# Altium PCB cSLIM-shield.PcbDoc (part 2 of 2)
Units mm, origin at the board's own origin, x right, y up, seen from the top; angles counter-clockwise.
Board outline 102.87 x 55.88 mm, 2 copper layers (F.Cu, B.Cu); 128 components, 156 nets, 529 pads, 123 vias.
Unrouted connection lines stored in the file: 8.
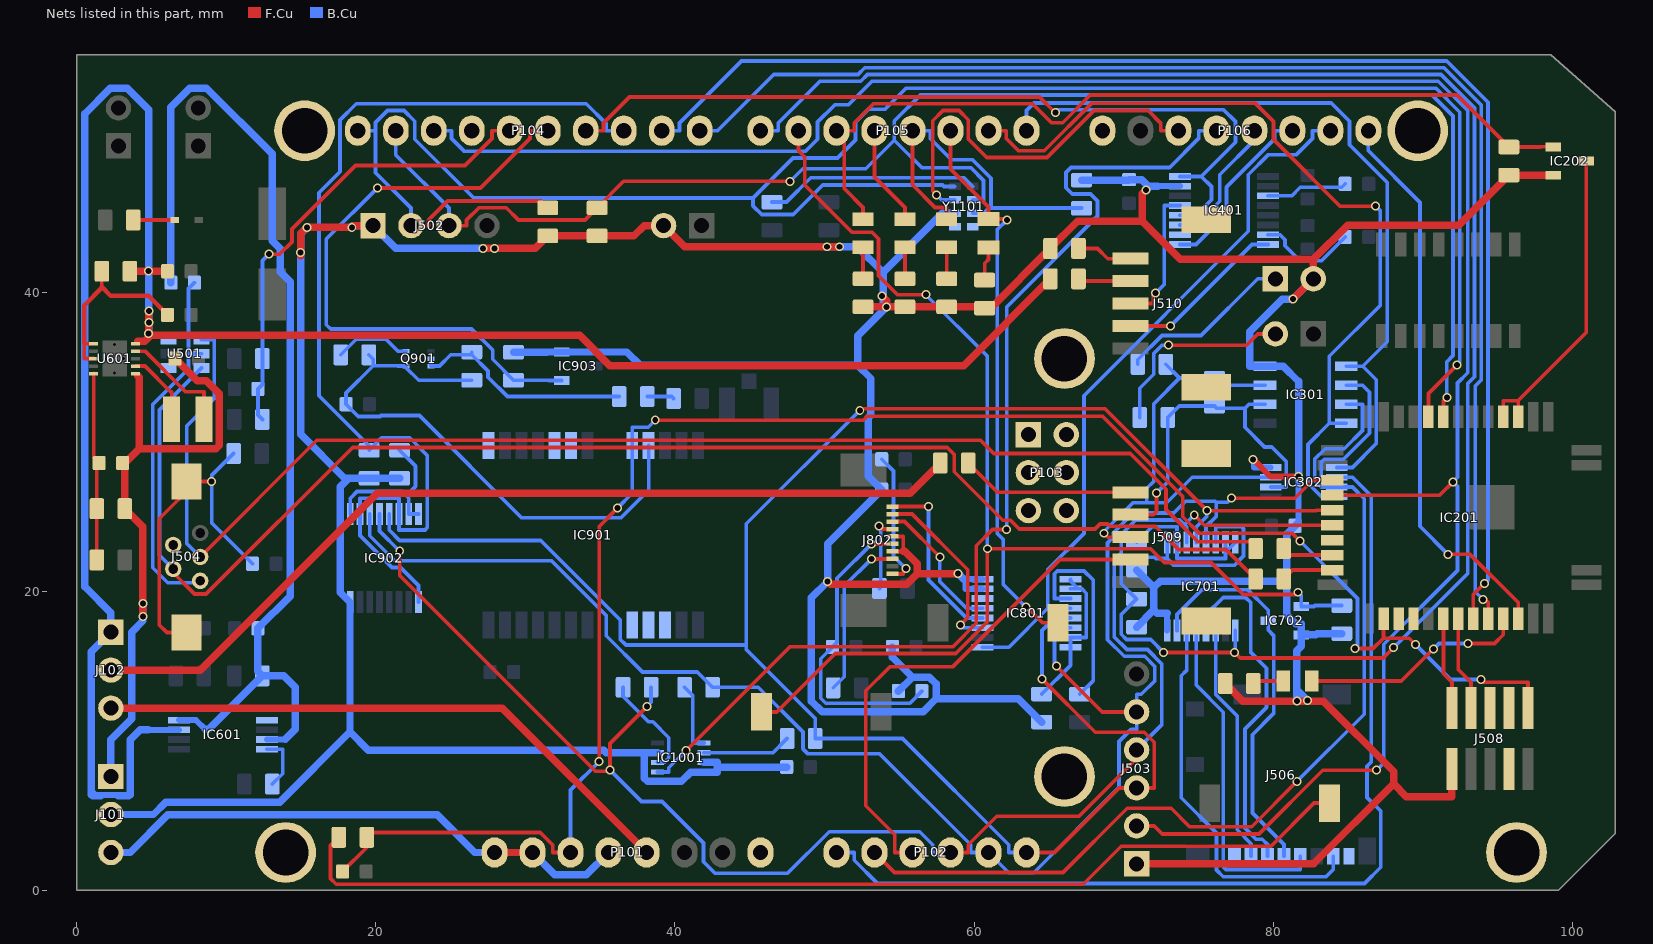
[diagram p2: the nets of this part, all layers, seen from the top]

## Via types
v1: diameter 0.6, hole 0.4, F.Cu to B.Cu, tented both sides, 123 vias

## Nets (pads, with @x,y where several pads share a name; then routed paths per layer and width w, separated by ;. In a path a pad name is that pad's centre, name@x,y a point inside that pad or via, vN(x,y) a via of type N, cw(c..) or ccw(c..) an arc to the next point about the centre after c; other vN are vias at no path point) (continued)
I2C_SCL: IC201.9 J502.2 P104.1 R102.1 Y1101.8 | length 136
  F.Cu w0.25: J502.2@22.352,44.45 23.527,44.45 23.527,44.817 24.802,46.092 31.046,46.092 R102.1@31.496,45.641 ; IC201.9@90.376,31.675 90.376,33.229 v1(92.277,35.13)
  B.Cu w0.25: P104.1@18.796,50.8 19.985,50.8 ; J502.2@22.352,44.45 22.352,45.625 19.985,47.992 19.985,50.8 ; 58.709,47.07 57.984,47.07 57.883,47.17 49.881,47.17 47.91,45.199 45.798,45.199 45.225,45.772 45.225,46.294 ; v1(92.277,35.13) 92.476,35.329 92.476,52.033 90.878,53.63 55.45,53.63 54.059,52.24 52.946,52.24 52.07,51.364 52.07,50.173 50.863,48.966 47.897,48.966 45.225,46.294 ; 19.985,50.8 19.985,51.352 20.781,52.148 21.887,52.148 22.606,51.429 22.606,50.231 26.543,46.294 45.225,46.294
I2C_SDA: IC201.8 J502.3 P104.2 R101.1 Y1101.2 | length 110.3
  F.Cu w0.25: J502.3@24.892,44.45 26.067,44.45 26.067,44.817 26.891,45.641 28.723,45.641 29.544,44.821 33.978,44.821 R101.1@34.798,45.641 36.568,47.411 v1(47.702,47.411) ; IC201.8@91.376,31.675 91.376,32.75 91.404,32.75 v1(91.602,32.949)
  B.Cu w0.25: P104.2@21.336,50.8 21.336,49.181 24.892,45.625 J502.3@24.892,44.45 ; v1(47.702,47.411) 48.538,48.247 52.749,48.247 54.667,50.165 ; 59.909,46.17 60.634,46.17 60.634,47.471 59.789,48.317 56.516,48.317 54.667,50.165 ; v1(91.602,32.949) 91.602,35.34 92.022,35.759 92.022,51.778 90.62,53.18 56.411,53.18 54.667,51.437 54.667,50.165
LoRa_nRESET: C603.1 IC201.25 IC901.8 J508.10 P101.3 R605.1 | length 121.9
  F.Cu w0.25: C603.1@17.781,1.27 19.402,2.891 R605.1@19.401,3.556 19.729,3.883 30.992,3.883 31.831,3.044 31.831,2.54 P101.3@33.02,2.54 ; v1(34.935,8.627) 34.935,24.343 v1(36.163,25.571) ; v1(38.681,31.446) 52.587,31.446 52.845,31.703 68.588,31.703 73.951,26.34 73.951,24.981 75.04,23.892 81.261,23.892 v1(81.773,23.38) ; v1(85.455,16.171) 86.677,16.171 87.376,16.869 ; IC201.25@87.376,18.175 87.376,17.1 87.376,16.869 ; v1(89.509,16.45) 89.09,16.869 87.376,16.869 ; v1(93.874,14.112) 94.07,13.915 97.028,13.915 J508.10@97.028,12.193
  B.Cu w0.25: P101.3@33.02,2.54 33.02,6.712 v1(34.935,8.627) ; v1(36.163,25.571) 37.144,26.552 IC901.8@37.144,29.749 37.144,30.974 38.21,30.974 v1(38.681,31.446) ; v1(81.773,23.38) 85.63,19.523 85.63,16.346 v1(85.455,16.171) ; v1(89.509,16.45) 91.848,14.112 v1(93.874,14.112)
LoRa_SWDCLK: IC201.30 J508.4 | length 6.3
  F.Cu w0.25: IC201.30@92.376,18.175 92.376,17.1 92.376,14.757 93.218,13.915 J508.4@93.218,12.193
LoRa_SWDIO: IC201.29 J508.2 | length 6.2
  F.Cu w0.25: IC201.29@91.376,18.175 91.376,14.487 91.948,13.915 J508.2@91.948,12.193
LoRa_SWO: J508.6
LoRa_USB_DM: IC201.22 R501.2 | length 3.5
  F.Cu w0.25: R501.2@80.693,20.828 81.291,21.425 IC201.22@83.956,21.425
LoRa_USB_DP: IC201.21 R502.2 | length 3.4
  F.Cu w0.25: R502.2@80.693,22.86 81.128,22.425 82.881,22.425 IC201.21@83.956,22.425
MOSI: IC801.11 J802.2 | length 12
  F.Cu w0.25: J802.2@54.531,25.167 55.854,25.167 59.576,21.445 59.576,18.244 v1(59.08,17.748)
  B.Cu w0.25: v1(59.08,17.748) 59.262,17.567 IC801.11@60.562,17.567
nCS: IC801.13 J802.3 | length 9.4
  F.Cu w0.25: J802.3@54.531,24.667 55.347,24.667 v1(57.708,22.306)
  B.Cu w0.25: v1(57.708,22.306) 57.708,20.658 59.499,18.867 IC801.13@60.562,18.867
Net-(C501-Pad1): C501.1 J504.MP1 J504.MP2 R503.1 | length 23.4
  F.Cu w0.25: J504.MP1@7.355,17.251 6.03,17.251 5.526,17.755 5.526,24.859 J504.MP2@8.018,27.351 ; J504.MP2@7.355,27.351 J504.MP2@8.018,27.351 ; v1(9.023,27.351) 8.68,27.351 J504.MP2@8.018,27.351
  B.Cu w0.25: R503.1@10.493,29.21 9.023,27.741 v1(9.023,27.351) 9.023,24.581 C501.1@11.76,21.844
Net-(C606-Pad1): C606.1 R607.1 U601.6 U601.8 | length 12.8
  F.Cu w0.25: U601.8@1.14,35.56 0.515,35.56 0.515,36.56 0.827,36.56 U601.6@1.14,36.56 ; 1.68,40.357 R607.1@1.681,41.402
  F.Cu w0.3: 0.515,36.56 0.508,36.567 0.508,39.116 1.68,40.288 1.68,40.357 2.286,39.751 4.826,39.751 5.609,38.968 5.609,38.943 C606.1@6.071,38.481
Net-(C608-Pad2): C608.2 R608.2 R609.1 U601.10 | length 12.7
  F.Cu w0.25: U601.10@1.14,34.56 1.14,28.934 C608.2@1.499,28.575 1.349,28.425 R608.2@1.349,25.527 R609.1@1.349,22.098
Net-(C806-Pad1): C806.1 FB802.2 J802.6 | length 20.4
  F.Cu w0.25: v1(53.134,23.167) J802.6@54.531,23.167
  B.Cu w0.25: v1(53.134,23.167) 50.836,20.87 50.836,16.586 C806.1@50.529,16.278 49.748,15.497 49.748,12.858 50.086,12.519 55.705,12.519 FB802.2@56.513,13.328
Net-(C902-Pad1): C902.1 IC901.9 Q901.4 R904.2 R906.2 | length 38.4
  B.Cu w0.25: R906.2@19.528,35.814 19.825,35.518 19.825,35.083 ; R904.2@26.416,34.115 22.866,34.115 22.025,34.956 Q901.4@22.025,35.06 21.465,35.06 21.442,35.083 19.825,35.083 ; IC901.9@38.244,29.749 38.244,26.768 36.401,24.925 29.742,24.925 22.912,31.754 20.352,31.754 20.291,31.694 18.827,31.694 C902.1@18.009,32.512 18.009,33.266 19.825,35.083
Net-(D601-Pad2): D601.2 R610.1 | length 2.8
  F.Cu w0.25: R610.1@3.779,44.831 D601.2@6.566,44.831
Net-(FB501-Pad2): FB501.2 J504.1 U501.5 | length 24.7
  B.Cu w0.25: FB501.2@7.874,40.64 7.484,40.249 7.484,35.88 ; J504.1@8.255,20.701 8.135,20.581 6.084,20.581 5.087,21.578 5.087,32.487 7.484,34.884 7.484,35.88 ; U501.5@8.339,35.88 7.484,35.88
Net-(FB801-Pad1): FB801.1 J802.10 | length 9.1
  F.Cu w0.25: J802.10@54.531,21.167 55.256,21.167 55.256,21.348 v1(55.433,21.525)
  B.Cu w0.25: FB801.1@53.823,28.829 54.61,28.042 54.61,22.348 v1(55.433,21.525)
Net-(H101-Pad1): H101.1
Net-(H102-Pad1): H102.1
Net-(H103-Pad1): H103.1
Net-(H104-Pad1): H104.1
Net-(H105-Pad1): H105.1
Net-(H106-Pad1): H106.1
Net-(IC201-Pad3): IC201.3 IC201.4 IC202.3 | length 21.1
  F.Cu w0.25: IC201.4@95.376,31.675 95.376,32.75 96.376,32.75 ; IC201.3@96.376,31.675 96.376,32.75 ; IC202.3@100.922,48.768 100.922,37.296 96.376,32.75
Net-(IC201-Pad20): IC201.20
Net-(IC201-Pad26): IC201.26
Net-(IC201-Pad27): IC201.27
Net-(IC401-Pad10): IC401.10
Net-(IC601-Pad1): IC601.1
Net-(IC601-Pad4): IC601.4 R604.1 | length 3.7
  B.Cu w0.25: IC601.4@12.717,9.439 13.78,9.439 13.78,7.811 R604.1@13.08,7.112
Net-(IC701-Pad2): IC701.2 IC701.7 IC701.8 R702.1 | length 10.4
  B.Cu w0.25: R702.1@70.866,23.289 71.897,24.321 73.559,24.321 IC701.2@73.559,23.258 73.559,22.195 76.809,22.195 IC701.7@76.809,22.727 ; IC701.7@76.809,23.258 IC701.7@76.809,22.727 ; IC701.8@77.459,23.258 76.928,22.727 IC701.7@76.809,22.727
Net-(IC801-Pad1): IC801.1 IC801.2 IC801.7 IC801.8 R802.1 | length 10.7
  B.Cu w0.25: R802.1@64.516,13.129 66.438,15.051 IC801.8@66.438,16.267 IC801.7@66.438,16.917 67.501,16.917 67.501,19.877 67.211,20.167 IC801.2@66.969,20.167 ; IC801.2@66.438,20.167 IC801.2@66.969,20.167 ; IC801.1@66.438,20.817 66.438,20.698 IC801.2@66.969,20.167
Net-(IC801-Pad3): IC801.3 R805.1 | length 13.7
  B.Cu w0.25: IC801.3@66.438,19.517 65.375,19.517 65.375,21.179 65.564,21.367 67.354,21.367 67.974,20.748 67.974,14.047 R805.1@67.056,13.129
Net-(IC801-Pad14): IC801.14
Net-(IC901-Pad1): IC901.1
Net-(IC901-Pad5): IC901.5
Net-(IC901-Pad6): IC901.6
Net-(IC901-Pad15): IC901.15
Net-(IC901-Pad16): IC901.16
Net-(IC901-Pad17): IC901.17
Net-(IC902-Pad1): IC902.1 IC902.7 IC902.8 R902.1 | length 10.8
  B.Cu w0.25: IC902.1@18.299,25.163 18.299,26.226 18.749,26.676 21.749,26.676 22.03,26.395 ; R902.1@21.59,29.434 22.654,28.37 22.654,27.018 22.03,26.395 ; IC902.8@22.849,25.163 IC902.7@22.199,25.163 22.199,26.226 22.03,26.395
Net-(IC1001-Pad2): IC1001.2 R1001.2 | length 7
  B.Cu w0.25: R1001.2@36.528,13.589 36.528,12.984 38.234,11.277 38.523,11.277 39.586,10.214 39.586,8.868 39.283,8.565 IC1001.2@38.836,8.565
Net-(IC1001-Pad5): IC1001.5 R1003.2 | length 4.7
  B.Cu w0.25: R1003.2@40.641,13.589 41.186,13.044 41.186,9.865 IC1001.5@41.936,9.865
Net-(IC1001-Pad6): IC1001.6 R1002.2 | length 6
  B.Cu w0.25: IC1001.6@41.936,9.215 46.554,9.215 R1002.2@47.499,10.16
Net-(J301-Pad1): J301.1 R302.1 | length 11.7
  B.Cu w0.25: R302.1@70.945,35.179 70.945,35.478 72.568,37.102 75.169,37.102 78.962,40.894 J301.1@80.137,40.894
Net-(J302-Pad2): J302.2 R303.2 | length 13.3
  F.Cu w0.25: v1(73,36.454) 78.205,36.454 78.962,37.211 J302.2@80.137,37.211
  B.Cu w0.25: R303.2@71.072,31.623 71.072,33.576 72.006,34.511 72.006,35.902 72.558,36.454 v1(73,36.454)
Net-(J504-Pad4): J504.4
Net-(J506-Pad1): J506.1
Net-(J506-Pad8): J506.8
Net-(J508-Pad7): J508.7
Net-(J508-Pad8): J508.8
Net-(J509-Pad1): J509.1 R509.1 | length 11.7
  F.Cu w0.25: R509.1@59.611,28.575 61.564,26.622 J509.1@70.46,26.622
Net-(J509-PadMP1): J509.MP1
Net-(J509-PadMP2): J509.MP2
Net-(J510-Pad1): J510.1 R508.1 | length 3.8
  F.Cu w0.25: R508.1@66.977,42.926 68.252,42.926 68.935,42.243 J510.1@70.46,42.243
Net-(J510-Pad2): J510.2 R511.1 | length 3.5
  F.Cu w0.25: R511.1@66.977,40.894 67.128,40.743 J510.2@70.46,40.743
Net-(J510-PadMP1): J510.MP1
Net-(J510-PadMP2): J510.MP2
Net-(J802-Pad4): J802.4 R801.1 | length 5.2
  F.Cu w0.25: v1(53.627,24.359) 53.806,24.18 53.806,24.167 J802.4@54.531,24.167
  B.Cu w0.25: v1(53.627,24.359) 53.761,24.225 53.761,20.281 R801.1@53.673,20.193
Net-(J802-Pad8): J802.8 R804.1 | length 11.1
  F.Cu w0.25: v1(53.135,22.167) J802.8@54.531,22.167
  B.Cu w0.25: R804.1@50.579,13.548 51.316,14.286 51.316,20.348 v1(53.135,22.167)
Net-(L601-Pad1): L601.1 U601.4 | length 7.5
  F.Cu w0.25: U601.4@3.94,36.06 4.565,36.06 7.279,33.346 8.51,33.346 L601.1@8.51,31.496
Net-(L601-Pad2): L601.2 U601.2 | length 5
  F.Cu w0.25: U601.2@3.94,35.06 4.565,35.06 6.279,33.346 6.35,33.346 L601.2@6.35,31.496
Net-(L901-Pad2): L901.2 R905.2 | length 1.8
  B.Cu w0.25: R905.2@38.148,33.02 39.782,33.02 L901.2@39.909,32.893
Net-(LED501-Pad2): LED501.2 R504.1 | length 2.3
  F.Cu w0.25: R504.1@60.706,40.815 60.706,41.938 60.96,42.192 LED501.2@60.96,42.992
Net-(LED502-Pad2): LED502.2 R505.1 | length 2.1
  F.Cu w0.25: R505.1@58.166,40.894 LED502.2@58.166,42.992
Net-(LED503-Pad2): LED503.2 R506.1 | length 2.1
  F.Cu w0.25: R506.1@55.372,40.894 LED503.2@55.372,42.992
Net-(LED504-Pad2): LED504.2 R507.1 | length 2.1
  F.Cu w0.25: R507.1@52.578,40.894 LED504.2@52.578,42.992
Net-(LED505-Pad2): LED505.2 R510.1 | length 2.1
  F.Cu w0.25: R510.1@78.661,13.843 78.819,14 LED505.2@80.679,14
Net-(P101-Pad8): P101.8
Net-(P103-Pad1): P103.1
Net-(P103-Pad2): P103.2
Net-(P103-Pad3): P103.3
Net-(P103-Pad4): P103.4
Net-(P103-Pad5): P103.5
Net-(P103-Pad6): P103.6
Net-(P104-Pad4): P104.4
Net-(P106-Pad1): P106.1
Net-(Q901-Pad2): Q901.2 Q901.3 R904.1 R905.1 | length 15
  B.Cu w0.25: Q901.2@23.695,35.56 Q901.3@23.695,35.06 24.255,35.06 25.013,35.817 R904.1@26.416,35.817 ; R904.1@26.416,35.989 R904.1@26.416,35.817 ; R905.1@36.274,33.02 28.795,33.02 27.495,34.32 27.495,34.738 R904.1@26.416,35.817
Net-(Q901-Pad6): Q901.6 R906.1 | length 5.1
  B.Cu w0.25: R906.1@17.654,35.814 18.688,36.849 20.676,36.849 21.465,36.06 Q901.6@22.025,36.06
Net-(R605-Pad2): R605.2 S601.1 | length 72.2
  F.Cu w0.25: R605.2@17.527,3.556 16.973,3.002 16.973,0.809 17.36,0.422 67.299,0.422 69.831,2.953 79.842,2.953 82.731,5.842 S601.1@83.756,5.842
Net-(R1101-Pad1): R1101.1 Y1101.1 | length 14.3
  B.Cu w0.25: R1101.1@46.482,46.022 47.46,46.022 49.083,47.645 59.334,47.645 59.909,47.07
Net-(U501-Pad1): U501.1
Net-(U501-Pad3): U501.3
P0.00: IC301.1 IC302.1 P105.8 | length 51.7
  B.Cu w0.25: P105.8@63.5,50.8 63.5,52.141 64.001,52.643 83.877,52.643 85.09,51.43 85.09,49.864 87.628,47.326 87.628,36.692 85.987,35.052 ; IC302.1@84.254,28.28 85.292,28.28 86.892,29.88 86.892,34.148 85.987,35.052 ; IC301.1@84.881,35.052 85.969,35.052 85.987,35.052
P0.01: IC301.4 IC302.4 P105.7 | length 55.7
  F.Cu w0.25: P105.7@60.96,50.8 62.149,50.8 62.149,50.28 62.97,49.459 64.691,49.459 67.856,52.624 78.805,52.624 80.01,51.419 80.01,50.207 84.465,45.752 v1(86.836,45.752)
  B.Cu w0.25: IC302.4@84.254,26.33 83.216,26.33 82.316,27.231 82.316,29.811 83.746,31.242 ; IC301.4@84.881,31.242 83.906,31.242 83.746,31.242 ; v1(86.836,45.752) 87.162,45.426 87.162,39.13 83.746,35.714 83.746,31.242
P0.02: LED501.1 P105.6 PB2.1 | length 37.7
  F.Cu w0.25: P105.6@58.42,50.8 58.42,48.232 60.96,45.692 LED501.1@60.96,44.892 62.01,44.892 62.066,44.836 v1(62.2,44.836) ; v1(63.459,18.945) 63.531,18.945 64.57,17.907 PB2.1@65.595,17.907
  B.Cu w0.25: v1(62.2,44.836) 61.55,44.186 61.55,23.874 61.949,23.475 61.949,20.455 v1(63.459,18.945)
P0.03: LED502.1 P105.5 R1103.1 Y1101.3 | length 23.6
  F.Cu w0.25: P105.5@55.88,50.8 55.88,49.459 55.88,47.178 57.391,45.667 58.166,45.667 LED502.1@58.166,44.892
  B.Cu w0.25: P105.5@55.88,50.8 57.069,50.8 57.069,50.28 58.498,48.851 59.899,48.851 61.135,47.615 61.135,45.623 ; 59.909,45.27 60.634,45.27 60.987,45.623 61.135,45.623 ; R1103.1@67.183,45.623 61.135,45.623
P0.04: LED503.1 P105.4 | length 6.7
  F.Cu w0.25: P105.4@53.34,50.8 53.34,49.459 53.34,47.699 55.372,45.667 LED503.1@55.372,44.892
P0.05: IC202.1 LED504.1 P105.3 R203.1 | length 58.1
  F.Cu w0.25: P105.3@50.8,50.8 P105.3@51.312,50.8 ; LED504.1@52.578,44.892 52.578,45.667 51.312,46.933 P105.3@51.312,50.8 ; IC202.1@98.722,49.718 97.872,49.718 97.859,49.705 R203.1@95.758,49.705 92.287,53.176 67.772,53.176 65.928,51.332 65.167,51.332 63.895,52.604 53.273,52.604 51.989,51.32 51.989,50.8 P105.3@51.312,50.8
P0.06: IC702.1 P105.2 PB1.1 R703.1 | length 83.4
  F.Cu w0.25: PB1.1@45.784,11.938 46.809,11.938 50.723,15.852 58.768,15.852 60.887,17.971 v1(60.887,22.847) 71.796,22.847 72.708,21.935 75.843,21.935 77.992,19.786 81.508,19.786 v1(81.662,19.939) ; P105.2@48.26,50.8 48.26,49.459 48.672,49.047 48.672,47.165 51.832,44.005 53.179,44.005 53.608,43.576 53.608,41.099 54.873,39.833 v1(56.773,39.833)
  B.Cu w0.25: v1(56.773,39.833) 60.887,35.719 v1(60.887,22.847) ; v1(81.662,19.939) 81.872,19.729 IC702.1@81.872,18.984 82.722,18.984 82.789,19.051 R703.1@84.582,19.05
P0.07: IC701.1 IC701.6 IC701.9 P105.1 R701.1 | length 129.8
  F.Cu w0.25: v1(72.67,15.913) v1(77.42,15.913) 77.788,15.545 87.352,15.545 v1(88.051,16.244)
  B.Cu w0.25: P105.1@45.72,50.8 46.909,50.8 46.909,51.32 49.698,54.109 52.42,54.109 52.87,54.559 91.223,54.559 93.449,52.333 93.449,34.351 92.999,33.901 92.999,21.192 v1(88.051,16.244) ; v1(72.67,15.913) 71.804,16.779 70.186,16.779 69.84,17.126 69.84,18.453 R701.1@70.866,19.479 69.839,20.506 69.839,21.94 70.172,22.274 72.081,22.274 72.16,22.195 72.909,22.195 ; IC701.1@72.909,23.258 72.909,22.195 ; IC701.6@76.159,23.258 76.159,24.321 77.881,24.321 78.009,24.193 78.009,22.357 77.388,21.736 73.368,21.736 72.909,22.195 ; v1(77.42,15.913) 77.459,15.953 IC701.9@77.459,17.382
P0.08: IC201.32 P104.10 | length 90
  F.Cu w0.25: v1(94.038,19.44) 94.187,19.44 94.376,19.25 IC201.32@94.376,18.175
  B.Cu w0.25: P104.10@41.656,50.8 42.845,50.8 46.604,54.559 52.233,54.559 52.683,55.009 91.41,55.009 93.9,52.519 93.9,34.13 93.502,33.733 93.502,19.975 v1(94.038,19.44)
P0.09: IC201.31 P104.9 | length 93.5
  F.Cu w0.25: IC201.31@93.376,18.175 93.376,19.784 v1(94.129,20.538)
  B.Cu w0.25: P104.9@39.116,50.8 40.305,50.8 40.305,51.32 44.445,55.46 91.596,55.46 94.35,52.706 94.35,20.758 v1(94.129,20.538)
P0.10: IC902.2 IC902.6 IC902.9 P104.8 R901.1 | length 69.5
  B.Cu w0.25: R901.1@19.558,29.434 R901.1@19.7,29.576 ; IC902.9@22.849,19.287 22.849,20.397 21.652,21.595 21.084,21.595 18.949,23.73 IC902.2@18.949,25.163 18.949,26.226 21.549,26.226 IC902.6@21.549,25.163 21.549,24.1 23.285,24.1 23.445,24.26 23.445,29.089 22.27,30.264 20.388,30.264 R901.1@19.7,29.576 ; P104.8@36.576,50.8 35.387,50.8 35.387,51.284 34.072,52.599 18.688,52.599 17.602,51.513 17.602,48.059 16.195,46.651 16.195,33.081 R901.1@19.7,29.576
P0.11: IC401.12 IC401.16 P104.7 | length 55.9
  F.Cu w0.25: P104.7@34.036,50.8 35.225,50.8 35.225,51.32 36.959,53.054 64.374,53.054 v1(65.427,52.001)
  B.Cu w0.25: v1(65.427,52.001) 65.619,52.192 76.683,52.192 77.47,51.405 77.47,50.019 75.192,47.741 ; IC401.12@73.77,45.141 74.833,45.141 75.871,46.18 75.871,47.061 75.192,47.741 ; IC401.16@73.77,47.741 75.192,47.741
P0.12: IC903.1 P104.6 R903.1 | length 41.5
  F.Cu w0.25: v1(20.107,46.97) 26.997,46.97 30.307,50.28 30.307,50.8 P104.6@31.496,50.8
  B.Cu w0.25: v1(20.107,46.97) 16.686,43.548 16.686,37.83 16.982,37.534 26.406,37.534 27.813,36.127 27.813,35.512 R903.1@29.21,34.115 31.565,34.115 31.578,34.102 IC903.1@32.428,34.102
P0.13: C602.1 P104.5 R601.1 R603.1 | length 31.8
  F.Cu w0.25: v1(12.851,42.545) 13.575,42.545 14.39,43.36 14.39,44.221 18.639,48.47 25.957,48.47 27.767,50.28 27.767,50.8 P104.5@28.956,50.8
  B.Cu w0.25: R603.1@12.416,31.496 12.117,31.796 C602.1@12.116,33.528 12.417,33.828 R601.1@12.416,35.56 12.417,42.111 v1(12.851,42.545)
P0.14: IC301.2 IC302.2 P102.1 | length 76.7
  B.Cu w0.25: P102.1@50.8,2.54 51.989,2.54 51.989,2.02 53.539,0.47 86.1,0.47 87.183,1.554 87.183,5.311 86.272,6.222 86.272,8.3 86.553,8.582 86.553,26.368 85.292,27.63 85.179,27.63 84.607,27.63 IC302.2@84.254,27.63 83.216,27.63 83.216,28.64 83.407,28.83 84.701,28.83 86.441,30.571 86.441,33.31 85.969,33.782 IC301.2@84.881,33.782
P0.15: IC301.3 IC302.3 P102.2 | length 65.2
  F.Cu w0.25: P102.2@53.34,2.54 54.681,1.199 65.944,1.199 70.238,5.493 73.183,5.493 74.41,4.267 78.562,4.267 v1(81.575,7.279)
  B.Cu w0.25: v1(81.575,7.279) 86.081,11.785 86.081,26.191 85.292,26.98 84.66,26.98 IC302.3@84.254,26.98 83.216,26.98 82.766,27.43 82.766,28.827 83.479,29.54 84.754,29.54 85.969,30.755 85.969,32.512 IC301.3@84.881,32.512
P0.16: J509.4 P102.3 | length 34.1
  F.Cu w0.25: P102.3@55.88,2.54 54.691,2.54 54.691,3.729 52.759,5.661 52.759,13.356 54.354,14.951 58.562,14.951 65.733,22.122 68.935,22.122 J509.4@70.46,22.122
P0.17: IC201.19 IC701.3 IC902.4 J503.4 P102.4 R1001.1 | length 109
  F.Cu w0.25: v1(21.6,22.682) 21.6,21.061 34.693,7.969 35.563,7.969 v1(35.658,8.063) 35.658,9.834 v1(38.121,12.297) ; P102.4@58.42,2.54 59.609,2.54 59.609,3.06 61.515,4.966 67.022,4.966 70.866,8.81 J503.4@70.866,9.398 ; v1(74.718,25.099) 75.392,24.425 IC201.19@83.956,24.425
  B.Cu w0.25: IC902.4@20.249,25.163 20.249,24.033 v1(21.6,22.682) ; v1(35.658,8.063) 37.77,5.951 39.131,5.951 41.91,3.172 41.91,1.924 42.682,1.152 47.533,1.152 50.312,3.931 56.36,3.931 57.231,3.06 57.231,2.54 P102.4@58.42,2.54 ; v1(38.121,12.297) 38.402,12.579 R1001.1@38.402,13.589 ; J503.4@70.866,9.398 72.537,11.069 72.537,15.162 71.595,16.104 70.219,16.104 69.368,16.955 69.368,22.106 69.84,22.578 69.84,23.808 70.807,24.776 73.741,24.776 74.061,24.456 74.074,24.456 ; IC701.3@74.209,23.258 74.209,24.321 74.074,24.456 ; v1(74.718,25.099) 74.074,24.456
P0.18: IC201.16 IC701.5 IC801.6 IC902.3 J503.5 P102.5 R1003.1 | length 115.1
  F.Cu w0.25: v1(65.494,15.005) 68.561,11.938 J503.5@70.866,11.938 ; v1(77.217,26.226) 81.442,26.226 82.64,27.425 IC201.16@83.956,27.425
  B.Cu w0.25: IC902.3@19.599,25.163 19.599,24.1 19.599,23.717 21.267,22.05 31.741,22.05 35.405,18.385 35.405,17.036 37.826,14.615 41.489,14.615 R1003.1@42.515,13.589 45.575,13.589 48.56,10.604 48.56,9.469 48.895,9.134 53.697,9.134 59.771,3.06 59.771,2.54 P102.5@60.96,2.54 62.319,1.181 63.989,1.181 69.691,6.882 69.691,9.955 70.499,10.763 70.866,10.763 70.866,11.35 J503.5@70.866,11.938 70.866,13.113 71.178,13.113 72.078,14.012 72.078,14.984 71.408,15.653 70.033,15.653 68.918,16.769 68.918,23.236 69.299,23.617 69.299,23.904 70.625,25.23 73.345,25.23 74.137,26.022 76.116,26.022 76.186,25.952 ; v1(65.494,15.005) 65.375,15.124 65.375,17.567 IC801.6@66.438,17.567 ; IC701.5@75.509,23.258 75.509,24.334 76.186,25.011 76.186,25.952 ; v1(77.217,26.226) 76.943,25.952 76.186,25.952
P0.19: IC201.18 IC701.4 IC801.5 IC902.5 J503.3 P102.6 R1002.1 | length 138.5
  F.Cu w0.25: v1(52.355,32.098) 52.46,32.203 68.755,32.203 v1(75.561,25.397) 82.852,25.397 82.881,25.425 IC201.18@83.956,25.425 ; P102.6@63.5,2.54 65.373,2.54 69.691,6.858 J503.3@70.866,6.858 72.041,6.858 72.041,9.909 71.377,10.573 68.104,10.573 v1(64.539,14.138)
  B.Cu w0.25: IC902.5@20.899,25.163 20.899,24.1 21.593,23.407 31.021,23.407 36.347,18.08 36.347,16.785 36.722,16.411 44.769,16.411 ; v1(52.355,32.098) 44.769,24.512 44.769,16.411 ; P102.6@63.5,2.54 62.311,2.54 62.311,3.06 55.211,10.16 R1002.1@49.373,10.16 49.374,11.498 44.769,16.102 44.769,16.411 ; v1(64.539,14.138) 64.539,17.381 65.375,18.217 IC801.5@66.438,18.217 ; IC701.4@74.859,23.258 74.859,24.321 75.561,25.023 v1(75.561,25.397)
P0.20: IC201.17 J503.2 P104.3 | length 146.8
  F.Cu w0.25: J503.2@70.866,4.318 72.041,4.318 72.583,3.776 79.05,3.776 83.315,8.041 v1(86.897,8.041) ; IC201.17@83.956,26.425 91.118,26.425 v1(92.013,27.32)
  B.Cu w0.25: P104.3@23.876,50.8 25.065,50.8 25.065,50.28 25.929,49.416 48.717,49.416 49.53,50.229 49.53,51.374 50.693,52.537 51.597,52.537 53.169,54.109 91.036,54.109 92.999,52.146 92.999,34.616 92.318,33.934 92.318,27.624 v1(92.013,27.32) 92.317,27.015 92.317,21.395 87.385,16.462 87.385,8.529 v1(86.897,8.041)
P0.21: IC201.34 P106.8 | length 37.6
  F.Cu w0.25: v1(91.692,22.472) 93.154,22.472 96.376,19.25 IC201.34@96.376,18.175
  B.Cu w0.25: P106.8@86.36,50.8 86.36,49.459 89.817,46.002 89.817,24.348 v1(91.692,22.472)
P0.22: IC801.4 IC801.9 P106.7 | length 48.5
  B.Cu w0.25: IC801.9@60.562,16.267 62.324,16.267 64.924,18.867 ; IC801.4@66.438,18.867 64.924,18.867 ; P106.7@83.82,50.8 82.631,50.8 82.631,50.28 81.548,49.197 79.678,49.197 78.329,47.847 78.329,44.068 67.342,33.082 67.342,23.874 64.924,21.456 64.924,18.867
P0.23: IC401.9 P106.6 | length 12
  B.Cu w0.25: IC401.9@73.77,43.191 74.833,43.191 76.869,45.227 76.869,47.024 80.091,50.247 80.091,50.8 P106.6@81.28,50.8
P0.24: IC401.11 P106.5 | length 9
  B.Cu w0.25: IC401.11@73.77,44.491 74.833,44.491 76.418,46.076 76.418,47.847 78.74,50.169 P106.5@78.74,50.8
P0.25: IC1001.1 P106.4 | length 72.7
  F.Cu w0.25: v1(40.749,9.366) 47.685,16.302 58.581,16.302 60.147,17.867 60.147,23.045 61.234,24.132 v1(62.175,24.132)
  B.Cu w0.25: IC1001.1@38.836,7.915 39.586,7.915 39.586,8.203 v1(40.749,9.366) ; v1(62.175,24.132) 62.175,39.016 68.248,45.089 68.248,46.093 67.78,46.561 66.566,46.561 66.149,46.977 66.149,48.011 66.483,48.345 73.076,48.345 75.011,50.28 75.011,50.8 P106.4@76.2,50.8
P0.26: P106.3 Y1101.7 | length 27.4
  F.Cu w0.25: v1(57.487,46.513) 57.231,46.769 57.231,51.46 57.92,52.149 58.993,52.149 59.609,51.533 59.609,50.236 60.838,49.007 64.876,49.007 68.018,52.148 71.643,52.148 72.471,51.32 72.471,50.8 P106.3@73.66,50.8
  B.Cu w0.25: v1(57.487,46.513) 57.83,46.17 58.709,46.17
PB03: IC201.33 LED505.1 | length 15.2
  F.Cu w0.25: LED505.1@82.579,14 88.562,14 v1(90.72,16.158) ; v1(93.011,16.51) 94.786,16.51 95.376,17.1 IC201.33@95.376,18.175
  B.Cu w0.25: v1(90.72,16.158) 91.072,16.51 v1(93.011,16.51)
RS232_RX: IC401.8 J510.4 | length 11.4
  F.Cu w0.25: J510.4@70.46,37.743 v1(73.135,37.743)
  B.Cu w0.25: v1(73.135,37.743) 78.583,43.191 IC401.8@79.646,43.191
RS232_TX: IC401.13 J510.3 | length 9.4
  F.Cu w0.25: J510.3@70.46,39.243 71.985,39.243 71.985,39.79 v1(72.138,39.942)
  B.Cu w0.25: v1(72.138,39.942) 72.707,40.512 72.707,45.791 IC401.13@73.77,45.791
RS485_A: IC301.6 IC302.6 J509.2 R301.2 R303.1 | length 23.2
  F.Cu w0.25: J509.2@70.46,25.122 71.985,25.122 72.198,25.335 v1(72.198,26.571)
  B.Cu w0.25: v1(72.198,26.571) 72.946,27.32 R303.1@72.946,31.623 73.708,32.385 R301.2@76.073,32.385 76.212,32.246 78.104,32.246 ; IC301.6@79.457,32.512 78.369,32.512 78.104,32.246 ; IC302.6@79.83,26.98 80.868,26.98 80.868,28.684 79.902,29.65 79.417,29.65 78.104,30.964 78.104,32.246
RS485_B: IC301.7 IC302.7 J509.3 R301.1 R302.2 | length 31.1
  F.Cu w0.25: v1(68.674,23.883) 68.935,23.622 J509.3@70.46,23.622
  B.Cu w0.25: v1(68.674,23.883) 68.674,23.979 70.621,25.927 71.549,25.927 ; R302.2@72.819,35.179 73.739,34.26 ; IC301.7@79.457,33.782 78.369,33.782 76.551,33.782 R301.1@76.073,34.26 73.739,34.26 ; IC302.7@79.83,27.63 74.578,27.63 72.875,25.927 71.549,25.927 ; 71.549,25.927 71.549,26.888 72.009,27.348 72.009,32.53 73.739,34.26
SCK: IC801.12 J802.1 | length 12
  F.Cu w0.25: J802.1@54.531,25.667 v1(56.95,25.667)
  B.Cu w0.25: v1(56.95,25.667) 56.95,20.766 59.499,18.217 IC801.12@60.562,18.217
TBR_PWR: J102.2 R509.2 | length 61.2
  F.Cu w0.5: J102.2@2.286,14.732 8.251,14.732 20.085,26.567 55.728,26.567 R509.2@57.737,28.575
USB_N: J504.2 R501.1 U501.6 | length 96.8
  F.Cu w0.25: J504.2@6.455,21.501 6.455,21.241 7.877,19.819 8.652,19.819 18.456,29.624 58.208,29.624 58.674,29.158 58.674,28 61.917,24.758 62.435,24.758 63.023,24.169 68.075,24.169 68.415,24.509 68.94,24.509 69.101,24.347 72.114,24.347 73.656,22.805 76.841,22.805 R501.1@78.819,20.828
  B.Cu w0.25: J504.2@6.455,21.501 5.538,22.418 5.538,32.129 U501.6@8.339,34.93
USB_P: J504.3 R502.1 U501.4 | length 94.1
  F.Cu w0.25: J504.3@8.255,22.301 16.05,30.097 60.431,30.097 61.317,29.21 70.444,29.21 72.824,26.831 72.824,25.472 74.973,23.322 78.356,23.322 R502.1@78.819,22.86
  B.Cu w0.25: J504.3@8.255,22.301 7.366,23.19 7.366,31.055 9.194,32.884 9.194,36.83 U501.4@8.339,36.83
USB_VBUS: C601.1 FB501.1 IC601.3 IC601.8 R602.1 | length 72.1
  B.Cu w0.4: IC601.8@6.841,11.389 7.979,11.389 8.601,10.767 ; IC601.3@12.717,10.089 13.855,10.089 13.876,10.11 13.934,10.11
  B.Cu w0.5: FB501.1@6.299,40.64 6.299,52.369 7.574,53.643 8.68,53.643 13.064,49.259 13.064,43.441 13.601,42.905 13.601,41.359 14.272,40.688 14.272,19.681 C601.1@12.116,17.526 12.117,14.651 R602.1@12.416,14.351 ; 8.601,10.767 8.833,10.767 R602.1@12.416,14.351 ; 13.934,10.11 14.605,10.781 14.605,13.589 13.843,14.351 R602.1@12.416,14.351
uSD_CLK: IC701.13 J506.5 | length 22.6
  B.Cu w0.25: IC701.13@74.859,17.382 74.859,16.319 74.859,13.717 76.663,11.914 76.663,1.579 76.834,1.407 81.813,1.407 J506.5@81.813,2.282
uSD_MISO: IC701.14 J506.7 | length 26.2
  B.Cu w0.25: IC701.14@74.209,17.382 74.209,14.714 73.853,14.357 73.853,6.207 76.212,3.847 76.212,1.365 76.657,0.921 83.527,0.921 84.013,1.407 J506.7@84.013,2.282
uSD_MOSI: IC701.12 J506.3 | length 23.5
  B.Cu w0.25: IC701.12@75.509,17.382 75.509,18.445 76.66,19.596 78.14,19.596 78.503,19.232 78.503,15.902 79.553,14.852 79.553,12.243 78.105,10.795 78.105,4.172 78.848,3.429 79.266,3.429 79.613,3.082 J506.3@79.613,2.282
uSD_nCS: IC701.11 J506.2 | length 16.1
  B.Cu w0.25: IC701.11@76.159,17.382 76.159,13.102 77.587,11.674 77.587,4.054 78.513,3.128 J506.2@78.513,2.282
uSD_VDD: IC701.15 IC702.3 J506.4 | length 28.3
  B.Cu w0.25: IC701.15@73.559,17.382 73.559,18.445 75.212,20.098 78.306,20.098 79.672,18.732 79.672,18.659 IC702.3@79.672,18.034 79.672,17.409 80.025,17.056 80.025,11.923 80.025,11.826 78.613,10.414 78.613,5.182 80.713,3.082 ; 79.444,4.351 80.713,3.082 ; J506.4@80.713,2.282 80.713,3.082
V+: C401.1 IC401.3 | length 5.5
  B.Cu w0.25: IC401.3@79.646,46.441 81.236,46.441 81.811,47.015 84.582,47.015 C401.1@84.811,47.244
V-: C402.1 IC401.7 | length 6.8
  B.Cu w0.25: IC401.7@79.646,43.841 80.456,43.841 80.793,43.504 80.793,43.108 81.795,42.105 83.228,42.105 C402.1@84.811,43.688
V_MUX_OUT: C605.1 IC601.7 J102.1 R511.2 R607.2 U601.5 | length 148.3
  F.Cu w0.24: U601.5@3.94,36.56 4.096,36.716
  F.Cu w0.5: R607.2@3.555,41.402 v1(4.813,41.402) C605.1@6.071,41.402 ; 4.096,36.716 4.55,36.716 v1@4.826,36.991 ; v1@4.826,37.338 v1@4.826,36.991 ; v1(4.826,38.735) 4.826,38.481 v1(4.826,37.973) v1@4.826,36.991 ; v1@4.942,37.107 33.637,37.107 35.648,35.096 59.305,35.096 R511.2@65.103,40.894
  B.Cu w0.4: 1.036,6.604 1.27,6.37 3.324,6.37 ; 4.297,10.739 4.77,10.739 IC601.7@6.841,10.739
  B.Cu w0.5: 1.27,6.32 1.076,6.32 ; 1.602,6.32 1.076,6.32 ; 2.774,6.32 3.496,6.32 3.586,6.41 3.586,10.082 4.243,10.739 ; 4.297,10.739 4.243,10.739 ; 4.77,10.739 4.243,10.739 ; v1@4.942,37.107 v1(4.813,37.236) v1(4.813,41.402) 4.813,52.19 3.374,53.629 2.243,53.629 0.554,51.94 0.554,20.304 2.286,18.572 J102.1@2.286,17.272 0.986,15.972 0.986,6.41 1.076,6.32
V_nRF_3V: J101.3 P101.1 P101.2 P101.4 | length 36.6
  F.Cu w0.5: P101.1@27.94,2.54 P101.2@30.48,2.54
  B.Cu w0.5: J101.3@2.286,2.54 3.586,2.54 6.099,5.052 24.114,5.052 26.626,2.54 P101.1@27.94,2.54 ; P101.2@30.48,2.54 31.964,1.056 34.076,1.056 P101.4@35.56,2.54
V_nRF_5V: J102.3 P101.5 | length 39.8
  F.Cu w0.5: J102.3@2.286,12.192 3.586,12.192 28.448,12.192 P101.5@38.1,2.54
V_reg: C607.1 C608.1 J101.1 R608.1 U601.1 | length 42.7
  F.Cu w0.24: U601.1@3.94,34.56 4.096,34.404
  F.Cu w0.5: C608.1@3.073,28.575 C608.1@3.223,28.575 ; 4.096,34.404 4.169,34.331 4.169,29.521 ; v1(4.427,18.306) 4.427,18.56 v1(4.427,19.199) 4.427,24.323 R608.1@3.223,25.527 C608.1@3.223,28.575 ; C607.1@6.579,35.56 8.058,34.08 8.66,34.08 9.539,33.202 9.539,29.751 9.309,29.521 4.169,29.521 ; C608.1@3.223,28.575 4.169,29.521
  B.Cu w0.5: J101.1@2.286,7.62 2.286,10.082 3.683,11.479 3.683,17.272 4.427,18.016 v1(4.427,19.199)
VDD: C301.1 C405.1 C807.1 C810.1 C1001.1 FB802.1 IC202.2 IC301.8 IC302.8 IC401.15 IC701.16 IC702.2 IC801.15 IC801.16 IC902.16 IC903.2 IC1001.3 IC1001.7 IC1001.8 J101.2 J301.2 J502.1 J503.1 J508.1 J511.2 J802.5 J802.7 R101.2 R102.2 R203.2 R504.2 R505.2 R506.2 R507.2 R508.2 R510.2 R701.2 R702.2 R703.2 R802.2 R901.2 R902.2 R903.2 R1103.2 Y1101.6 | length 406
  F.Cu w0.25: J802.7@54.531,22.667 55.256,22.667 55.256,23.667 J802.5@54.531,23.667
  F.Cu w0.4: v1(78.654,28.828) 79.805,27.677 v1(81.69,27.677)
  F.Cu w0.5: v1@14.965,42.439 14.965,42.82 14.965,43.894 v1(15.401,44.33) v1(18.391,44.33) 18.512,44.45 J502.1@19.812,44.45 ; v1(27.164,42.928) 30.657,42.928 R102.2@31.496,43.767 R101.2@34.798,43.767 37.259,43.767 37.943,44.45 J511.2@39.243,44.45 40.654,43.039 v1(50.993,43.039) ; v1(50.211,20.66) 50.384,20.486 55.487,20.486 56.186,21.185 ; R507.2@52.578,39.019 v1(54.157,39.019) ; v1(53.849,39.752) 54.157,39.443 v1(54.157,39.019) ; 55.256,22.667 55.371,22.667 56.186,21.852 56.186,21.185 ; v1(58.927,21.185) 56.186,21.185 ; J503.1@70.866,1.778 82.692,1.778 88.044,7.13 ; v1(71.497,46.835) 71.235,46.573 71.235,44.736 ; R510.2@76.787,13.843 77.974,12.656 v1(81.579,12.656) 83.343,12.656 88.044,7.955 88.044,7.13 ; v1@81.28,39.497 v1(81.315,39.532) J301.2@82.677,40.894 82.677,42.194 ; J508.1@91.948,8.127 91.948,6.28 88.894,6.28 88.044,7.13 ; IC202.2@98.722,47.818 97.747,47.818 97.734,47.831 R203.2@95.758,47.831 92.413,44.486 84.968,44.486 82.677,42.194 ; v1(54.157,39.019) R506.2@55.372,39.019 R505.2@58.166,39.019 60.627,39.019 R504.2@60.706,38.941 61.117,38.941 R508.2@65.103,42.926 66.912,44.736 71.235,44.736 ; 71.235,44.736 73.777,42.194 82.677,42.194
  B.Cu w0.3: v1(27.164,42.928) v1(27.942,42.928) 28.319,42.928
  B.Cu w0.4: IC902.16@18.274,19.262 IC902.16@18.299,19.287 ; IC801.15@60.562,20.167 59.424,20.167 59.424,20.817 IC801.16@60.562,20.817 ; v1@71.631,47.091 71.78,47.091 ; 72.281,47.091 IC401.15@73.77,47.091 ; IC701.16@72.909,17.382 72.909,18.52 ; v1(78.654,28.828) 78.717,28.765 78.717,28.28 IC302.8@79.83,28.28 ; C301.1@81.59,24.516 81.69,24.616 v1(81.69,27.677)
  B.Cu w0.5: J101.2@2.286,5.08 5.136,5.08 5.959,5.903 13.578,5.903 18.274,10.599 ; v1(15.401,44.33) 14.972,43.9 v1(14.972,42.658) 14.972,30.494 17.907,27.559 18.185,27.559 ; v1@18.415,44.403 18.462,44.45 J502.1@19.812,44.45 21.334,42.928 v1(27.164,42.928) ; R902.2@21.59,27.559 R901.2@19.558,27.559 18.185,27.559 ; R903.2@29.21,35.989 31.44,35.989 31.453,36.002 31.94,36.002 IC903.2@32.428,36.002 36.778,36.002 37.671,35.11 52.224,35.11 ; IC1001.3@38.836,9.215 37.961,9.215 ; IC1001.7@41.936,8.565 42.811,8.565 42.811,8.255 ; C1001.1@47.473,8.255 42.811,8.255 ; v1(50.179,43.039) v1(50.993,43.039) 52.199,43.039 53.907,41.331 53.92,41.331 ; C810.1@54.539,16.278 54.538,15.609 55.879,14.269 ; FB802.1@54.939,13.328 55.879,14.269 ; 58.709,45.27 57.859,45.27 53.92,41.331 ; v1(58.927,21.185) 59.296,20.817 59.424,20.817 ; R802.2@64.516,11.255 62.963,12.807 57.454,12.807 ; R1103.2@67.183,47.498 70.333,47.498 C405.1@70.358,47.523 71.198,47.523 71.631,47.091 71.631,46.969 v1(71.497,46.835) ; R701.2@70.866,17.605 72.02,18.758 ; R702.2@70.866,21.415 72.02,20.261 ; 71.78,47.091 72.281,47.091 ; 72.909,18.52 72.258,18.52 72.02,18.758 ; v1(81.579,12.656) 81.579,13.925 ; C301.1@81.59,24.516 C301.1@81.458,24.384 80.893,23.819 80.893,20.674 ; v1(81.69,27.677) 81.69,34.032 80.67,35.052 IC301.8@79.457,35.052 78.938,35.052 78.419,35.052 78.419,37.358 80.593,39.532 v1(81.315,39.532) J301.2@82.677,40.894 ; v1(82.296,12.7) 81.579,13.417 81.579,13.925 ; R703.2@84.582,17.176 82.939,17.176 82.847,17.084 IC702.2@81.872,17.084 ; 18.185,27.559 17.612,26.987 17.612,19.923 18.274,19.262 18.274,10.599 ; 18.274,10.599 19.495,9.378 35.246,9.378 35.408,9.215 37.961,9.215 ; 37.961,9.215 37.961,7.499 38.17,7.29 40.435,7.29 41.061,7.915 IC1001.8@41.936,7.915 42.374,7.915 42.811,7.915 42.811,8.255 ; 52.224,35.11 53.105,34.228 53.105,31.787 52.928,31.61 52.928,27.691 C807.1@53.823,26.797 50.211,23.185 v1(50.211,20.66) 49.124,19.573 49.124,12.668 49.848,11.944 56.591,11.944 57.454,12.807 ; 52.224,35.11 52.224,37.086 v1(54.157,39.019) 53.92,39.257 53.92,41.331 ; 55.879,14.269 56.998,14.269 57.454,13.812 57.454,12.807 ; 72.02,18.758 72.02,20.261 ; 72.02,20.261 72.433,20.674 80.893,20.674 ; 80.893,20.674 80.893,18.438 81.497,17.834 81.872,17.834 IC702.2@81.872,17.084 ; 81.579,13.925 81.579,16.04 81.872,16.334 IC702.2@81.872,17.084
pads on no net: J506.9 J506.10 J506.11 J506.12 J506.13 J506.14 J802.11 J802.12 U601.Un1 U601.Un2 U601.Un3 U601.Un4 U601.Un5 U601.Un6

## Polygon pours and split planes (outlines as drawn)
GND on F.Cu "F.Cu-GND" (solid, remove dead copper, pour order 0): 0,55.88 98.552,55.88 102.87,52.07 102.87,3.81 99.06,0 0,0
VDD on B.Cu "B.Cu-VDD" (solid, remove dead copper, pour order 1): 0,55.88 98.552,55.88 102.87,52.07 102.87,3.81 99.06,0 0,0

## Keep-outs
Edge.Cuts:
  lines w0.15: 0,0 0,55.88 ; 0,0 66.04,0 ; 0,0 0,55.88 ; 0,0 66.04,0 ; 0,55.88 64.516,55.88 ; 0,55.88 64.516,55.88 ; 17.018,37.973 17.018,38.227 ; 17.018,37.973 35.941,37.973 ; 17.018,37.973 17.018,38.227 ; 17.018,37.973 35.941,37.973 ; 17.018,38.227 17.018,38.862 ; 17.018,38.227 17.018,38.862 ; 17.018,38.862 17.018,42.418 ; 17.018,38.862 17.018,42.418 ; 17.018,42.418 51.054,42.418 ; 17.018,42.418 51.054,42.418 ; 35.941,37.973 37.719,37.973 ; 35.941,37.973 37.719,37.973 ; 37.719,37.973 40.132,35.56 ; 37.719,37.973 40.132,35.56 ; 40.132,35.56 43.053,35.56 ; 40.132,35.56 43.053,35.56 ; 43.053,35.56 51.054,35.56 ; 43.053,35.56 51.054,35.56 ; 51.054,35.56 51.054,38.862 ; 51.054,35.56 51.054,38.862 ; 51.054,38.862 51.054,42.418 ; 51.054,38.862 51.054,42.418 ; 64.516,55.88 98.552,55.88 ; 64.516,55.88 98.552,55.88 ; 66.04,0 99.06,0 ; 66.04,0 99.06,0 ; 98.552,55.88 102.87,52.07 ; 98.552,55.88 102.87,52.07 ; 99.06,0 102.87,3.81 ; 99.06,0 102.87,3.81 ; 102.87,3.81 102.87,40.64 ; 102.87,3.81 102.87,40.64 ; 102.87,40.64 102.87,52.07 ; 102.87,40.64 102.87,52.07

## Silkscreen, mask and mechanical layers (free items; w line width, h text height)
F.SilkS:
  lines w0.15: 8.89,44.323 8.89,45.339 ; 47.752,35.306 47.752,34.798 ; 48.133,34.544 47.752,34.798 ; 49.022,33.528 ccw(c48.387,34.163) 47.752,34.798
  text "+" at 1.564,54.824 h1.5 r90
  text "+" at 9.565,54.824 h1.5 r90
  text "BATTERY" at 4.109,54.712 h1
  text "P0.31" at 18.868,53.81 h0.7 r90
  text "P0.01" at 61.159,53.81 h0.7 r90
  text "P0.21" at 86.813,53.81 h0.7 r90
  text "P0.13" at 29.028,53.79 h0.7 r90
  text "P0.05" at 51.126,53.785 h0.7 r90
  text "P0.03" at 56.079,53.79 h0.7 r90
  text "P0.02" at 58.619,53.785 h0.7 r90
  text "P0.25" at 76.653,53.785 h0.7 r90
  text "P0.23" at 81.733,53.79 h0.7 r90
  text "P0.22" at 84.273,53.785 h0.7 r90
  text "P0.30" at 21.408,53.781 h0.7 r90
  text "P0.20" at 23.948,53.781 h0.7 r90
  text "P0.07" at 46.046,53.783 h0.7 r90
  text "P0.06" at 48.586,53.781 h0.7 r90
  text "P0.04" at 53.539,53.781 h0.7 r90
  text "P0.00" at 63.699,53.781 h0.7 r90
  text "P0.28" at 68.779,53.781 h0.7 r90
  text "P0.27" at 71.573,53.783 h0.7 r90
  text "P0.26" at 74.113,53.781 h0.7 r90
  text "P0.24" at 79.193,53.781 h0.7 r90
  text "GND" at 26.574,53.74 h1 r90
  text "P0.11" at 34.108,53.683 h0.7 r90
  text "P0.12" at 31.568,53.658 h0.7 r90
  text "P0.10" at 36.648,53.654 h0.7 r90
  text "P0.09" at 39.188,53.654 h0.7 r90
  text "P0.08" at 41.728,53.654 h0.7 r90
  text "-" at 2.173,47.192 h1.5
  text "-" at 7.761,47.192 h1.5
  text "RS232" at 72.476,46.958 h1
  text "VDD" at 19.49,46.73 h0.7
  text "VDD" at 38.655,46.709 h1
  text "GND" at 41.675,46.705 h1
  text "SCL" at 22.029,46.664 h0.7
  text "SDA" at 24.661,46.664 h0.7
  text "GND" at 27.217,46.664 h0.7
  text "VIO_REF" at 47.831,44.455 h1 r90
  text "RS485 / BIAS ENABLE" at 80.481,43.886 h0.7
  text "VTG" at 25.05,35.653 h1 r90
  text "VDD / nRF'" at 22.732,35.34 h1 r90
  text "SWO" at 31.781,35.295 h1 r90
  text "VDD /  nRF" at 18.521,35.266 h1 r90
  text "RESET" at 34.321,34.127 h1 r90
  text "VIN" at 39.651,33.801 h1 r90
  text "SWD_IO" at 26.495,33.562 h1 r90
  text "SWD_CLK" at 29.035,33.264 h1 r90
  text "GPS" at 47.63,31.831 h1.5
  text "GND / DETECT" at 37.455,31.793 h1 r90
  text "VDD_HV'" at 44.799,31.459 h1 r90
  text "VDD_HV" at 42.239,31.143 h1 r90
  text "RS485" at 72.349,30.956 h1
  text "u.fl" at 48.156,30.662 h0.7
  text "DISPLAY" at 47.402,20.3 h1 r90
  text "V_   MUX" at 6.618,16.943 h1
  text "TBR_PWR" at 6.292,14.276 h1
  text "GND" at 73.298,14.193 h1
  text "DISPLAY" at 18.757,14.162 h2
  text "LS013B7DH03" at 22.901,12.033 h1
  text "nRF_5V" at 5.955,11.736 h1
  text "MOSI" at 73.521,11.526 h1
  text "RESET" at 78.905,10.815 h1.27
  text "MISO" at 73.512,8.986 h1
  text "V_REG_3V" at 6.443,7.16 h1
  text "SCK" at 73.395,6.446 h1
  text "P0.17" at 58.705,6.219 h1 r90
  text "P0.18" at 61.245,6.216 h1 r90
  text "P0.19" at 63.277,6.216 h1 r90
  text "RESET" at 33.305,6.187 h1 r90
  text "N.C." at 46.005,5.93 h1 r90
  text "VDD" at 27.713,5.889 h1 r90
  text "VDD" at 30.253,5.889 h1 r90
  text "VDD" at 35.841,5.889 h1 r90
  text "GND" at 40.925,5.861 h1 r90
  text "GND" at 43.465,5.861 h1 r90
  text "5V" at 38.382,5.582 h1 r90
  text "14" at 51.08,5.359 h1 r90
  text "15" at 53.622,5.366 h1 r90
  text "16" at 56.162,5.358 h1 r90
  text "1" at 28.217,5.044 h1 r90
  text "VDD_BOARD" at 6.904,4.493 h1
  text "nCS" at 73.289,4.033 h1
  text "nRF_3V" at 5.955,2.208 h1
  text "VDD" at 73.199,1.37 h1
B.SilkS:
  text "GPS" at 49.188,32.608 h1
  text "E.Jølsgard / 2021" at 23.208,6.773 h1
Dwgs.User:
  lines w0.15: 62.357,24.13 67.437,24.13 67.437,31.75 62.357,31.75 62.357,24.13

## Dimensions
102.87,-0.254 to 0,0 on F.SilkS
0,55.88 to 0,0 on F.SilkS
37.91,12.636 to 11.303,12.636 on F.SilkS
15.938,36.449 to 15.938,6.096 on F.SilkS